# Altium PCB PowerBoard.PcbDoc (part 1 of 2)
Units mm, origin at the board's own origin, x right, y up, seen from the top; angles counter-clockwise.
Board outline 110 x 150 mm, 4 copper layers (Top Layer, Signal Layer 1, Signal Layer 2, Bottom Layer), stack 2.22 mm thick; 73 components, 20 nets, 361 pads, 2847 vias.
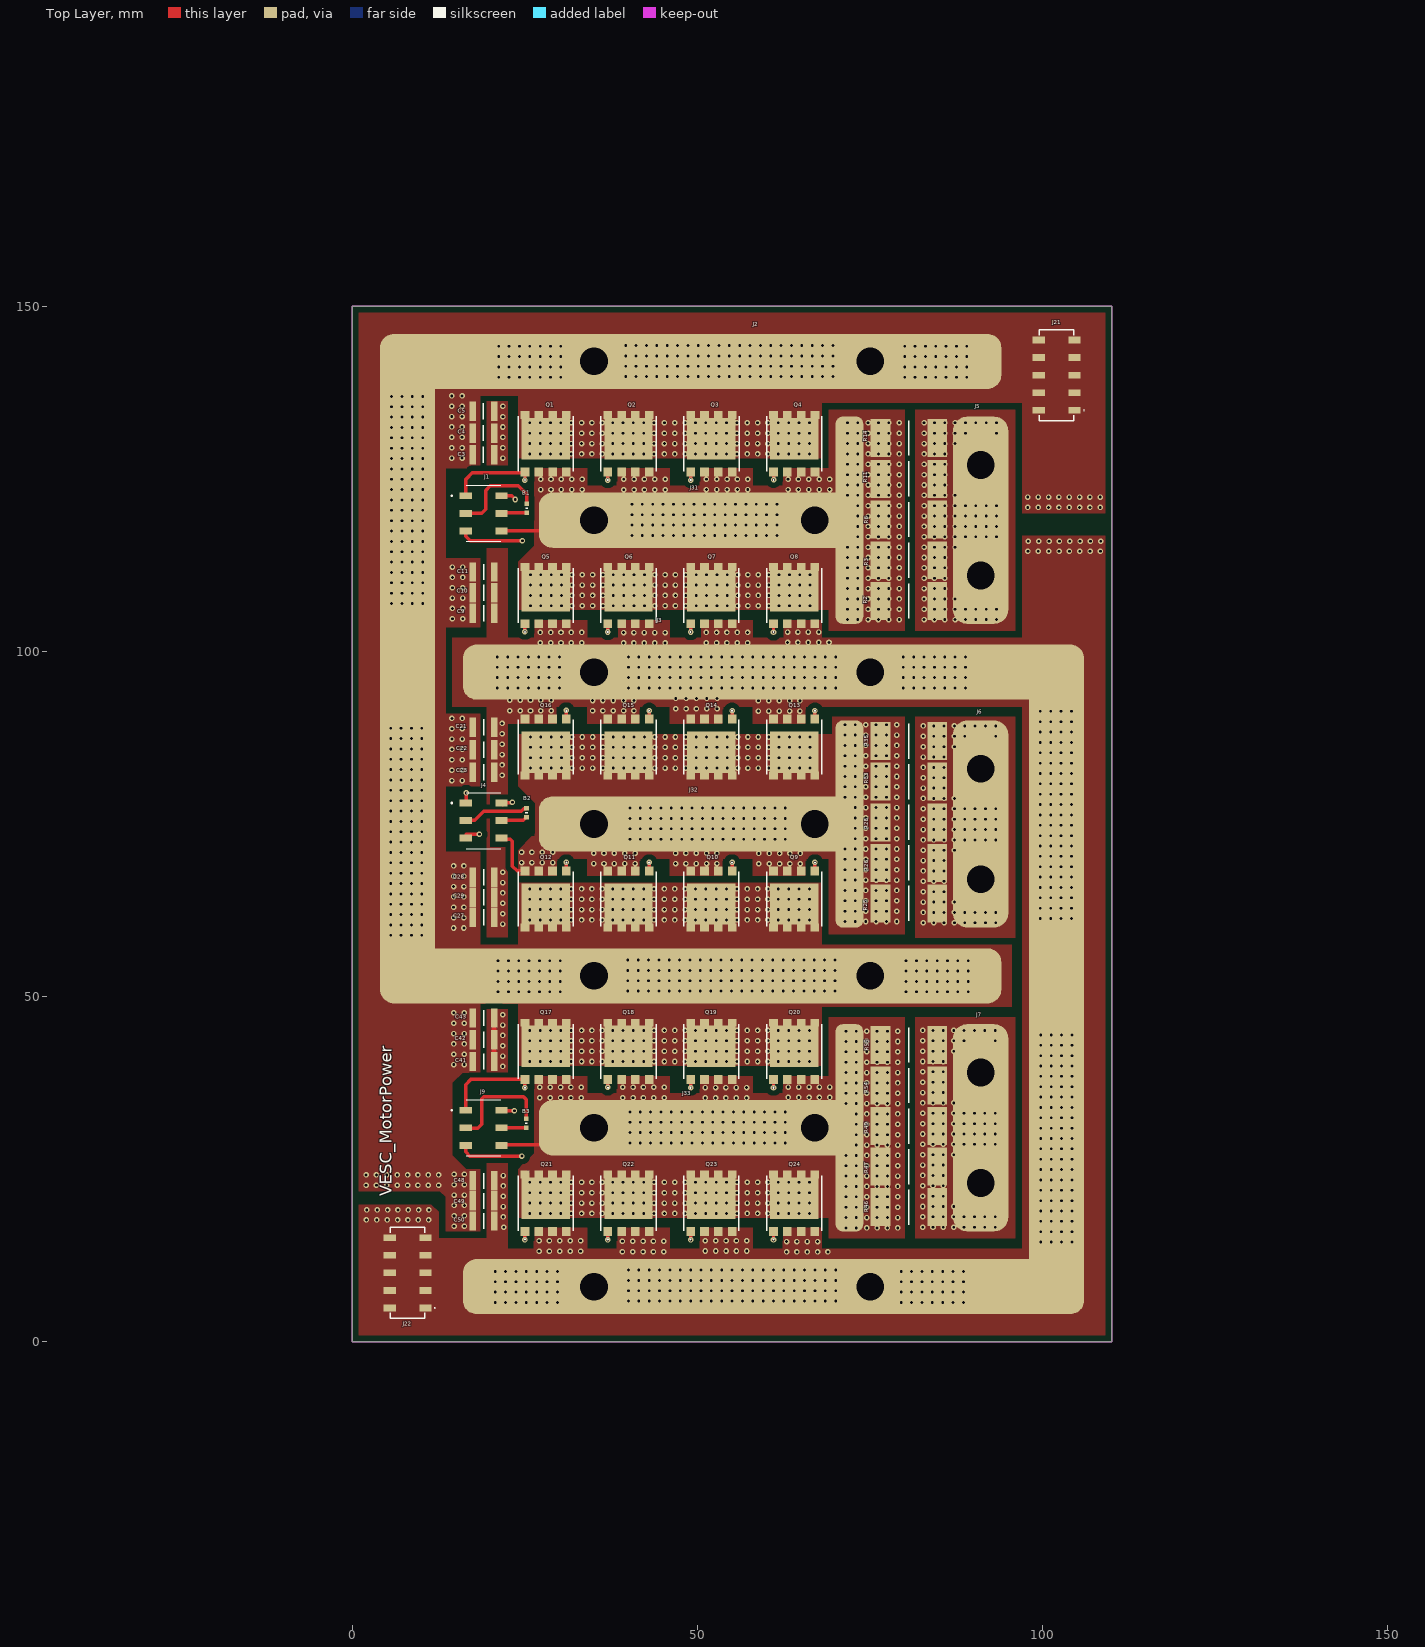
[diagram p0: Top Layer view]
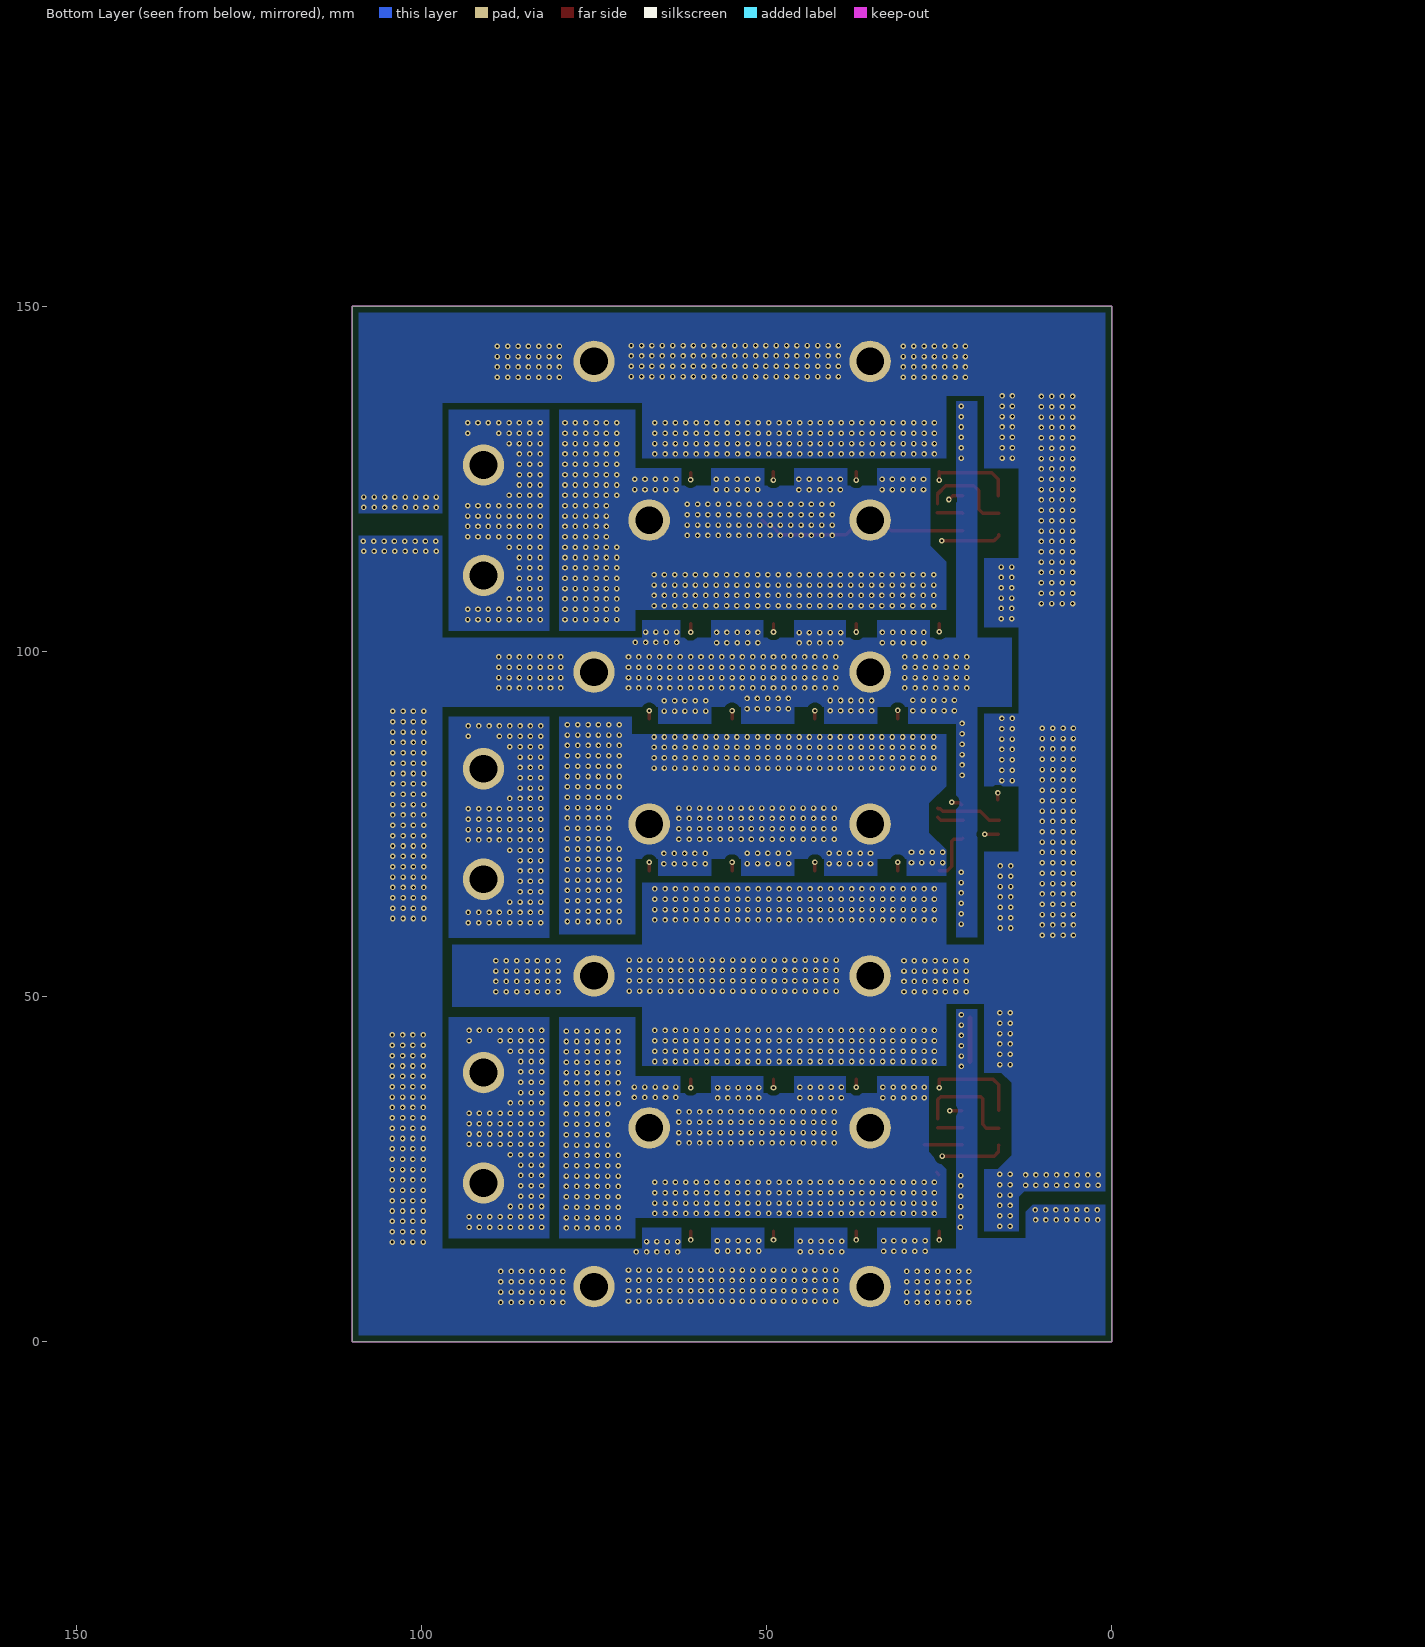
[diagram p1: Bottom Layer view, seen from below]
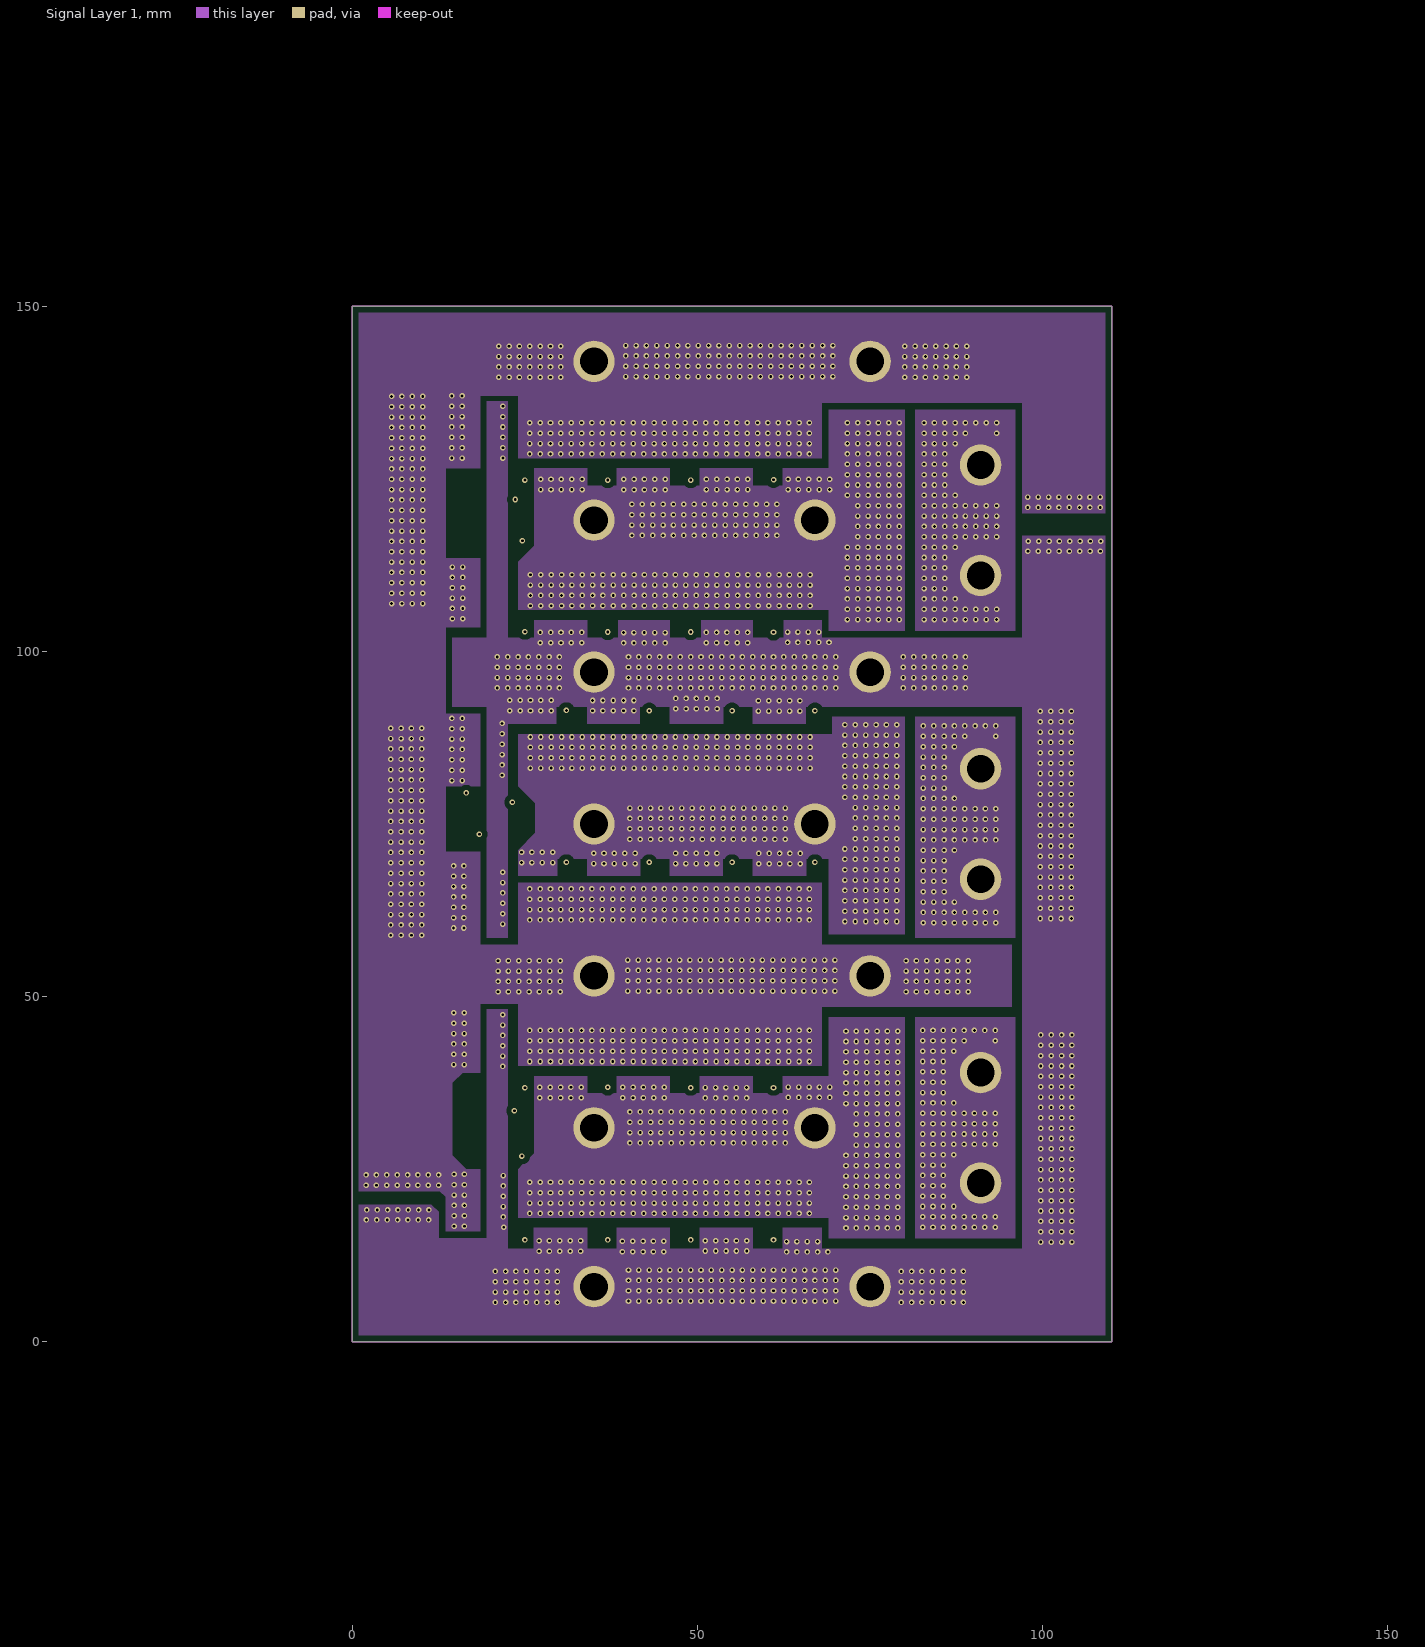
[diagram p2: Signal Layer 1]
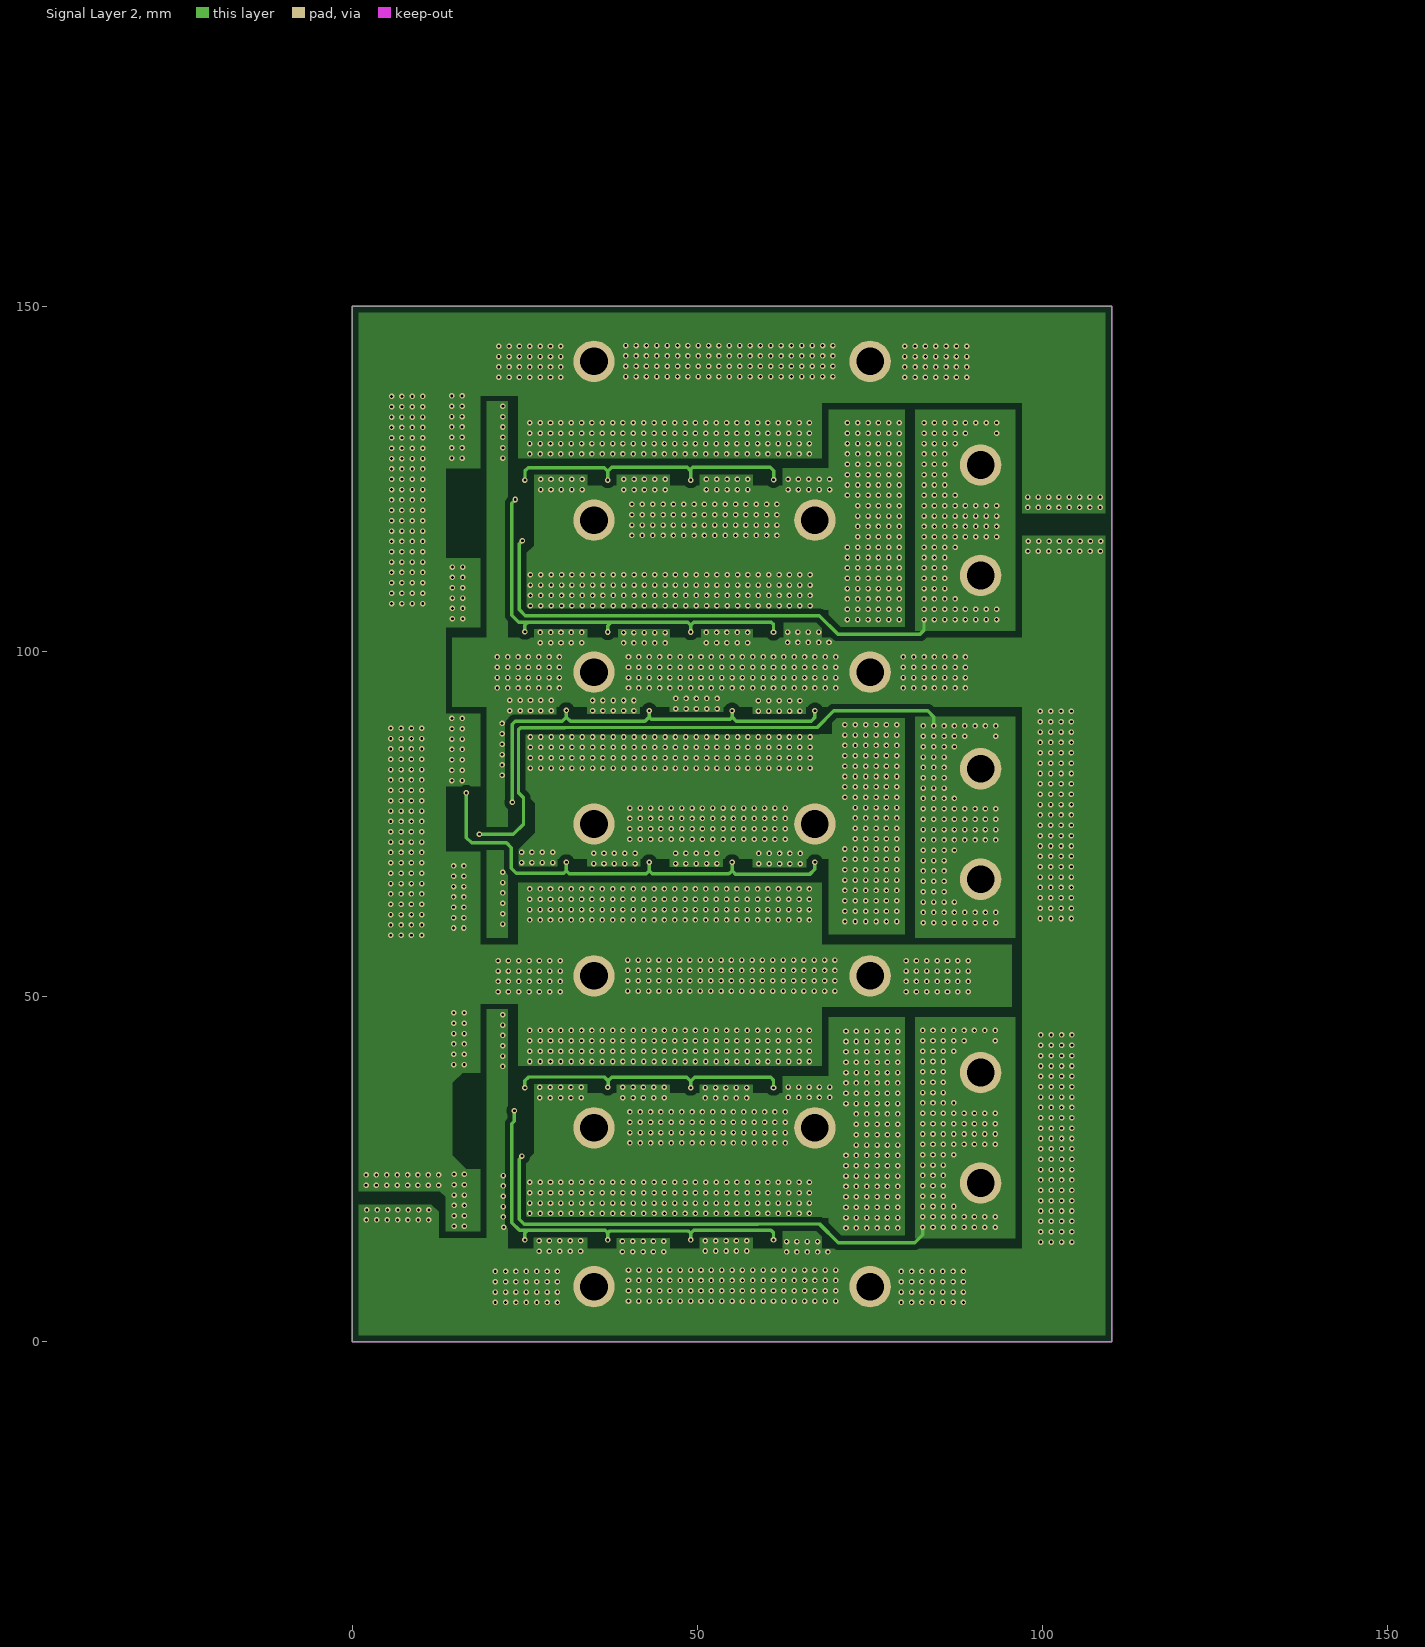
[diagram p3: Signal Layer 2]
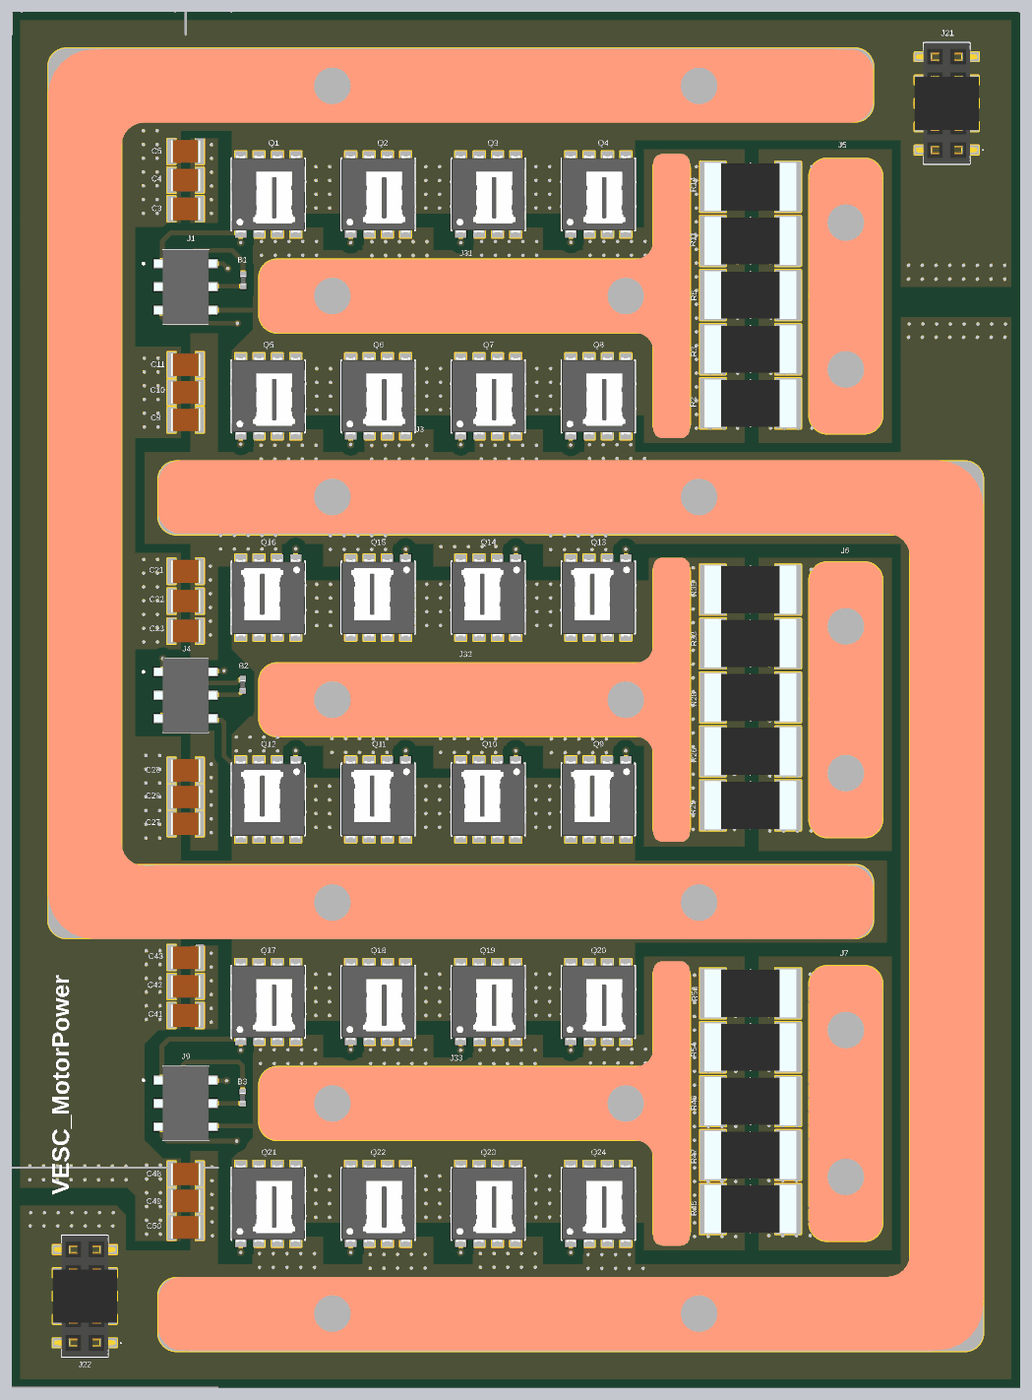
[diagram p5: 3D render of the assembled board from above, using the file's embedded part models]

## Layer stack, top to bottom
Top Solder: solder mask 0.025, Solder Resist, Dk 3.5
Top Layer: signal copper 0.07
Dielectric 2: core 0.254, Dk 4.2
Signal Layer 1: signal copper 0.036
Dielectric 4: core 1.5, Dk 4.2
Signal Layer 2: signal copper 0.036
Dielectric 3: core 0.254, Dk 4.2
Bottom Layer: signal copper 0.07
Bottom Solder: solder mask 0.025, Solder Resist, Dk 3.5

## Board outline
0,0 0,150 110,150 110,0

## Design rules (kind name [scope] priority, off if disabled: settings)
AssemblyTestPointUsage AssemblyTestPointUsage_1 [All] p2:
AssemblyTestpoint AssemblyTestpoint_1 [All] p1: testpointundercomponent=TRUE minsize=1.016 maxsize=2.54 preferedsize=1.524 minholesize=0 maxholesize=1.016 preferedholesize=0.813 testpointgrid=0.025 usegrid=TRUE gridtolerance=0 allowsidetop=TRUE allowsidebottom=TRUE
Clearance Clearance_1 [All] p1: gap=0.8 ignorepadtopadclearanceinfootprint=FALSE except(0.4: Arc-Arc Arc-Track Arc-SMDPad Arc-THPad Arc-Via Track-Track Track-SMDPad Track-THPad Track-Via SMDPad-SMDPad SMDPad-THPad SMDPad-Via THPad-THPad THPad-Via Via-Via)
ComponentClearance ComponentClearance_1 [All] p1: gap=0.2 collisioncheckmode=3 verticalgap=0.2 showdistances=TRUE
DiffPairsRouting DiffPairsRouting_1 [All] p1: maxlimit=0.254 minlimit=0.254 mostfreqgap=0.254 substack1={0391787D-B3DB-4B16-B312-97C439599AB4} toplayer_{0391787d-b3db-4b16-b312-97c439599ab4}_minwidth=0.381 toplayer_{0391787d-b3db-4b16-b312-97c439599ab4}_maxwidth=0.381 toplayer_{0391787d-b3db-4b16-b312-97c439599ab4}_prefwidth=0.381 midlayer1_{0391787d-b3db-4b16-b312-97c439599ab4}_minwidth=0.381 midlayer1_{0391787d-b3db-4b16-b312-97c439599ab4}_maxwidth=0.381 midlayer1_{0391787d-b3db-4b16-b312-97c439599ab4}_prefwidth=0.381 midlayer2_{0391787d-b3db-4b16-b312-97c439599ab4}_minwidth=0.381 midlayer2_{0391787d-b3db-4b16-b312-97c439599ab4}_maxwidth=0.381 midlayer2_{0391787d-b3db-4b16-b312-97c439599ab4}_prefwidth=0.381 bottomlayer_{0391787d-b3db-4b16-b312-97c439599ab4}_minwidth=0.381 bottomlayer_{0391787d-b3db-4b16-b312-97c439599ab4}_maxwidth=0.381 bottomlayer_{0391787d-b3db-4b16-b312-97c439599ab4}_prefwidth=0.381 substack2={0E55BCC6-0461-4BB8-A6DB-68FAAC3CF03A} toplayer_{0e55bcc6-0461-4bb8-a6db-68faac3cf03a}_minwidth=0.381 toplayer_{0e55bcc6-0461-4bb8-a6db-68faac3cf03a}_maxwidth=0.381 toplayer_{0e55bcc6-0461-4bb8-a6db-68faac3cf03a}_prefwidth=0.381 midlayer1_{0e55bcc6-0461-4bb8-a6db-68faac3cf03a}_minwidth=0.381 midlayer1_{0e55bcc6-0461-4bb8-a6db-68faac3cf03a}_maxwidth=0.381 midlayer1_{0e55bcc6-0461-4bb8-a6db-68faac3cf03a}_prefwidth=0.381 midlayer2_{0e55bcc6-0461-4bb8-a6db-68faac3cf03a}_minwidth=0.381 midlayer2_{0e55bcc6-0461-4bb8-a6db-68faac3cf03a}_maxwidth=0.381 midlayer2_{0e55bcc6-0461-4bb8-a6db-68faac3cf03a}_prefwidth=0.381 bottomlayer_{0e55bcc6-0461-4bb8-a6db-68faac3cf03a}_minwidth=0.381 bottomlayer_{0e55bcc6-0461-4bb8-a6db-68faac3cf03a}_maxwidth=0.381 bottomlayer_{0e55bcc6-0461-4bb8-a6db-68faac3cf03a}_prefwidth=0.381 substack3={7F91D735-8F98-4998-8FBE-C2B075826548} toplayer_{7f91d735-8f98-4998-8fbe-c2b075826548}_minwidth=0.381 toplayer_{7f91d735-8f98-4998-8fbe-c2b075826548}_maxwidth=0.381 toplayer_{7f91d735-8f98-4998-8fbe-c2b075826548}_prefwidth=0.381 midlayer1_{7f91d735-8f98-4998-8fbe-c2b075826548}_minwidth=0.381 midlayer1_{7f91d735-8f98-4998-8fbe-c2b075826548}_maxwidth=0.381 midlayer1_{7f91d735-8f98-4998-8fbe-c2b075826548}_prefwidth=0.381 midlayer2_{7f91d735-8f98-4998-8fbe-c2b075826548}_minwidth=0.381 midlayer2_{7f91d735-8f98-4998-8fbe-c2b075826548}_maxwidth=0.381 midlayer2_{7f91d735-8f98-4998-8fbe-c2b075826548}_prefwidth=0.381 bottomlayer_{7f91d735-8f98-4998-8fbe-c2b075826548}_minwidth=0.381 bottomlayer_{7f91d735-8f98-4998-8fbe-c2b075826548}_maxwidth=0.381 bottomlayer_{7f91d735-8f98-4998-8fbe-c2b075826548}_prefwidth=0.381 substack4={4ED4D01E-40BF-4D50-BA5A-F23A5EC9E761} toplayer_{4ed4d01e-40bf-4d50-ba5a-f23a5ec9e761}_minwidth=0.381 toplayer_{4ed4d01e-40bf-4d50-ba5a-f23a5ec9e761}_maxwidth=0.381 toplayer_{4ed4d01e-40bf-4d50-ba5a-f23a5ec9e761}_prefwidth=0.381 midlayer1_{4ed4d01e-40bf-4d50-ba5a-f23a5ec9e761}_minwidth=0.381 midlayer1_{4ed4d01e-40bf-4d50-ba5a-f23a5ec9e761}_maxwidth=0.381 midlayer1_{4ed4d01e-40bf-4d50-ba5a-f23a5ec9e761}_prefwidth=0.381 midlayer2_{4ed4d01e-40bf-4d50-ba5a-f23a5ec9e761}_minwidth=0.381 midlayer2_{4ed4d01e-40bf-4d50-ba5a-f23a5ec9e761}_maxwidth=0.381 midlayer2_{4ed4d01e-40bf-4d50-ba5a-f23a5ec9e761}_prefwidth=0.381 bottomlayer_{4ed4d01e-40bf-4d50-ba5a-f23a5ec9e761}_minwidth=0.381 bottomlayer_{4ed4d01e-40bf-4d50-ba5a-f23a5ec9e761}_maxwidth=0.381 bottomlayer_{4ed4d01e-40bf-4d50-ba5a-f23a5ec9e761}_prefwidth=0.381 substack5={57BA5FAC-A096-47A8-A9C3-28502E285703} toplayer_{57ba5fac-a096-47a8-a9c3-28502e285703}_minwidth=0.381 toplayer_{57ba5fac-a096-47a8-a9c3-28502e285703}_maxwidth=0.381 toplayer_{57ba5fac-a096-47a8-a9c3-28502e285703}_prefwidth=0.381 midlayer1_{57ba5fac-a096-47a8-a9c3-28502e285703}_minwidth=0.381 midlayer1_{57ba5fac-a096-47a8-a9c3-28502e285703}_maxwidth=0.381 midlayer1_{57ba5fac-a096-47a8-a9c3-28502e285703}_prefwidth=0.381 midlayer2_{57ba5fac-a096-47a8-a9c3-28502e285703}_minwidth=0.381 midlayer2_{57ba5fac-a096-47a8-a9c3-28502e285703}_maxwidth=0.381 midlayer2_{57ba5fac-a096-47a8-a9c3-28502e285703}_prefwidth=0.381 bottomlayer_{57ba5fac-a096-47a8-a9c3-28502e285703}_minwidth=0.381 bottomlayer_{57ba5fac-a096-47a8-a9c3-28502e285703}_maxwidth=0.381 bottomlayer_{57ba5fac-a096-47a8-a9c3-28502e285703}_prefwidth=0.381 toplayer_minwidth=0.381 toplayer_maxwidth=0.381 toplayer_prefwidth=0.381 midlayer1_minwidth=0.381 midlayer1_maxwidth=0.381 midlayer1_prefwidth=0.381 midlayer2_minwidth=0.381 midlayer2_maxwidth=0.381 midlayer2_prefwidth=0.381 bottomlayer_minwidth=0.381 bottomlayer_maxwidth=0.381 bottomlayer_prefwidth=0.381 substack6={B351C19E-D50C-4F2F-B5BB-791B69F230FF} toplayer_{b351c19e-d50c-4f2f-b5bb-791b69f230ff}_minwidth=0.381 toplayer_{b351c19e-d50c-4f2f-b5bb-791b69f230ff}_maxwidth=0.381 toplayer_{b351c19e-d50c-4f2f-b5bb-791b69f230ff}_prefwidth=0.381 midlayer1_{b351c19e-d50c-4f2f-b5bb-791b69f230ff}_minwidth=0.381 midlayer1_{b351c19e-d50c-4f2f-b5bb-791b69f230ff}_maxwidth=0.381 midlayer1_{b351c19e-d50c-4f2f-b5bb-791b69f230ff}_prefwidth=0.381 midlayer2_{b351c19e-d50c-4f2f-b5bb-791b69f230ff}_minwidth=0.381 midlayer2_{b351c19e-d50c-4f2f-b5bb-791b69f230ff}_maxwidth=0.381 midlayer2_{b351c19e-d50c-4f2f-b5bb-791b69f230ff}_prefwidth=0.381 bottomlayer_{b351c19e-d50c-4f2f-b5bb-791b69f230ff}_minwidth=0.381 bottomlayer_{b351c19e-d50c-4f2f-b5bb-791b69f230ff}_maxwidth=0.381 bottomlayer_{b351c19e-d50c-4f2f-b5bb-791b69f230ff}_prefwidth=0.381 substack7={2F1B6B62-C7FD-47FC-965D-ED7560D8E9E8} toplayer_{2f1b6b62-c7fd-47fc-965d-ed7560d8e9e8}_minwidth=0.381 toplayer_{2f1b6b62-c7fd-47fc-965d-ed7560d8e9e8}_maxwidth=0.381 toplayer_{2f1b6b62-c7fd-47fc-965d-ed7560d8e9e8}_prefwidth=0.381 midlayer1_{2f1b6b62-c7fd-47fc-965d-ed7560d8e9e8}_minwidth=0.381 midlayer1_{2f1b6b62-c7fd-47fc-965d-ed7560d8e9e8}_maxwidth=0.381 midlayer1_{2f1b6b62-c7fd-47fc-965d-ed7560d8e9e8}_prefwidth=0.381 midlayer2_{2f1b6b62-c7fd-47fc-965d-ed7560d8e9e8}_minwidth=0.381 midlayer2_{2f1b6b62-c7fd-47fc-965d-ed7560d8e9e8}_maxwidth=0.381 midlayer2_{2f1b6b62-c7fd-47fc-965d-ed7560d8e9e8}_prefwidth=0.381 bottomlayer_{2f1b6b62-c7fd-47fc-965d-ed7560d8e9e8}_minwidth=0.381 bottomlayer_{2f1b6b62-c7fd-47fc-965d-ed7560d8e9e8}_maxwidth=0.381 bottomlayer_{2f1b6b62-c7fd-47fc-965d-ed7560d8e9e8}_prefwidth=0.381 substack8={A0CE5E7A-17C9-422A-884C-87F0A86ADDD9} toplayer_{a0ce5e7a-17c9-422a-884c-87f0a86addd9}_minwidth=0.381 toplayer_{a0ce5e7a-17c9-422a-884c-87f0a86addd9}_maxwidth=0.381 toplayer_{a0ce5e7a-17c9-422a-884c-87f0a86addd9}_prefwidth=0.381 midlayer1_{a0ce5e7a-17c9-422a-884c-87f0a86addd9}_minwidth=0.381 midlayer1_{a0ce5e7a-17c9-422a-884c-87f0a86addd9}_maxwidth=0.381 midlayer1_{a0ce5e7a-17c9-422a-884c-87f0a86addd9}_prefwidth=0.381 midlayer2_{a0ce5e7a-17c9-422a-884c-87f0a86addd9}_minwidth=0.381 midlayer2_{a0ce5e7a-17c9-422a-884c-87f0a86addd9}_maxwidth=0.381 midlayer2_{a0ce5e7a-17c9-422a-884c-87f0a86addd9}_prefwidth=0.381 bottomlayer_{a0ce5e7a-17c9-422a-884c-87f0a86addd9}_minwidth=0.381 bottomlayer_{a0ce5e7a-17c9-422a-884c-87f0a86addd9}_maxwidth=0.381 bottomlayer_{a0ce5e7a-17c9-422a-884c-87f0a86addd9}_prefwidth=0.381 maxuncoupledlength=12.7
FabricationTestPointUsage FabricationTestPointUsage_1 [All] p1: valid=0 allowmultiple=FALSE
FabricationTestpoint FabricationTestpoint_1 [All] p1: side=3 testpointundercomponent=TRUE minsize=1.016 maxsize=2.54 preferedsize=1.524 minholesize=0 maxholesize=1.016 preferedholesize=0.813 testpointgrid=0.025 allowsidetop=TRUE allowsidebottom=TRUE usegrid=TRUE gridtolerance=0
FanoutControl Fanout_BGA_1 [IsBGA] p1: bgadir=Out bgaviamode=Centered fanoutstyle=Auto fanoutdirection=Alternating viagrid=0.025 // Fanout_BGA (Default Rule)
FanoutControl Fanout_LCC_1 [IsLCC] p2: bgadir=Out bgaviamode=Centered fanoutstyle=Auto fanoutdirection=Alternating viagrid=0.025 // Fanout_LCC (Default Rule)
FanoutControl Fanout_SOIC_1 [IsSOIC] p3: bgadir=Out bgaviamode=Centered fanoutstyle=Auto fanoutdirection=Alternating viagrid=0.025 // Fanout_SOIC (Default Rule)
FanoutControl Fanout_Small_1 [(CompPinCount < 5)] p4: bgadir=Out bgaviamode=Centered fanoutstyle=Auto fanoutdirection=OutThenIn viagrid=0.025 // Fanout_Small (Default Rule)
FanoutControl Fanout_Default_1 [All] p5: bgadir=Out bgaviamode=Centered fanoutstyle=Auto fanoutdirection=Alternating viagrid=0.025 // Fanout_Default (Default Rule)
Height Height_1 [All] p1: minheight=0 maxheight=25.4 prefheight=12.7
HoleSize HoleSize_1 [All] p1: absolutevalues=TRUE maxlimit=5 minlimit=0.3 maxpercent=80.000 minpercent=20.000
HoleToHoleClearance HoleToHoleClearance_1 [All] p1: gap=0.254 allowstackedmicrovias=TRUE
LayerPairs LayerPairs_1 [All] p1: enforce=TRUE
MinimumSolderMaskSliver MinimumSolderMaskSliver_1 [All] p1: minsoldermaskwidth=0.1
NetAntennae NetAntennae_1 [InNetClass('VIN')] p1: netantennaetolerance=0
PasteMaskExpansion PasteMaskExpansion_1 [All] p1: expansion=0
PlaneClearance PlaneClearance_1 [All] p1: clearance=0.508
PlaneConnect PlaneConnect_1 [All] p1: planeconnectstyle=Relief reliefexpansion=0.508 reliefentries=4 reliefconductorwidth=0.254 reliefairgap=0.254
PolygonConnect PolygonConnect_1 [All] p1: connectstyle=Direct reliefconductorwidth=0.254 reliefentries=4 polygonreliefangle="90 Angle" airgapwidth=0.254
RoomDefinition PowerBoard [InComponentClass('PowerBoard')] p1: confinementstyle=ConfineOut formatcopy=TRUE lockcomponents=FALSE outline -494.612,-773.935 -443.812,-773.935 -443.812,-748.535 -494.612,-748.535
RoutingCorners RoutingCorners_1 [All] p1: cornerstyle=45-Degree minsetback=2.54 maxsetback=2.54
RoutingLayers RoutingLayers_1 [All] p1: top layer_v5=TRUE mid layer 1_v5=TRUE mid layer 2_v5=TRUE bottom layer_v5=TRUE
RoutingPriority RoutingPriority_1 [All] p1: routingpriority=0
RoutingTopology RoutingTopology_1 [All] p1: topology=Shortest
RoutingVias RoutingVias_1 [All] p1: holewidth=0.4 width=0.8 viastyle="Through Hole" minholewidth=0.3 minwidth=0.6 maxholewidth=5 maxwidth=10
ShortCircuit ShortCircuit_1 [All] p1: allowed=FALSE
SilkToBoardRegionClearance SilkToBoardRegionClearance_1 [All] p2:
SilkToSilkClearance SilkToSilkClearance_1 [All] p1: silktosilkclearance=0
SilkToSolderMaskClearance SilkToSolderMaskClearance_1 [IsPad] p1: minsilkscreentomaskgap=0 clearancetoexposedcopper=TRUE
SolderMaskExpansion SolderMaskExpansion_1 [All] p1: expansion=0.102 istentingtop=FALSE
UnRoutedNet UnRoutedNet_1 [All] p1:
UnpouredPolygon UnpouredPolygon_1 [All] p1:
Width Width_1 [All] p1: maxlimit=3.048 minlimit=0.2 preferedwidth=0.254 substack1={0391787D-B3DB-4B16-B312-97C439599AB4} substack2={0E55BCC6-0461-4BB8-A6DB-68FAAC3CF03A} substack3={7F91D735-8F98-4998-8FBE-C2B075826548} substack4={4ED4D01E-40BF-4D50-BA5A-F23A5EC9E761} substack5={57BA5FAC-A096-47A8-A9C3-28502E285703} substack6={B351C19E-D50C-4F2F-B5BB-791B69F230FF} substack7={2F1B6B62-C7FD-47FC-965D-ED7560D8E9E8} substack8={A0CE5E7A-17C9-422A-884C-87F0A86ADDD9}
2 further rules are at their usual default settings.

## Components (designator, comment, footprint, x,y, rotation, side; value= is the part's Value field where it differs from the comment)
B1 "NTCS0402E3103GL1T" THRMC1005X65N 25.273,120.726 r270 top
B2 "NTCS0402E3103GL1T" THRMC1005X65N 25.222,76.632 r270 top
B3 "NTCS0402E3103GL1T" THRMC1005X65N 25.2,31.65 r270 top
C3 "10uF/100V" CAPC3225X230N 18.992,128.5 r180 top
C4 "10uF/100V" CAPC3225X230N 18.992,131.628 r180 top
C5 "10uF/100V" CAPC3225X230N 18.992,134.756 r180 top
C9 "10uF/100V" CAPC3225X230N 19,105.5 r0 top
C10 "10uF/100V" CAPC3225X230N 19,108.5 r0 top
C11 "10uF/100V" CAPC3225X230N 19,111.5 r0 top
C21 "10uF/100V" CAPC3225X230N 19,89 r180 top
C22 "10uF/100V" CAPC3225X230N 19,85.75 r180 top
C23 "10uF/100V" CAPC3225X230N 19,82.5 r180 top
C27 "10uF/100V" CAPC3225X230N 19,61.5 r0 top
C28 "10uF/100V" CAPC3225X230N 19,67.3 r0 top
C29 "10uF/100V" CAPC3225X230N 19,64.4 r0 top
C41 "10uF/100V" CAPC3225X230N 19,40.6 r180 top
C42 "10uF/100V" CAPC3225X230N 19,43.75 r180 top
C43 "10uF/100V" CAPC3225X230N 19,46.9 r180 top
C48 "10uF/100V" CAPC3225X230N 19,23.3 r0 top
C49 "10uF/100V" CAPC3225X230N 19,20.4 r0 top
C50 "10uF/100V" CAPC3225X230N 19,17.5 r0 top
J1 "PHASE_U" 61030621821 19,120 r270 top locked value=61030621821
J2 "74651194R" COPPER_CON1 35,142 r0 top locked
J3 "74651194R" COPPER_CON1 75,8 r180 top locked
J4 "PHASE_V" 61030621821 19,75.5 r270 top locked value=61030621821
J5 "74651194R" COPPER_CON3 91,119 r180 top locked
J6 "74651194R" COPPER_CON3 91,75 r0 top locked
J7 "74651194R" COPPER_CON3 91,31 r180 top locked
J9 "PHASE_W" 61030621821 19,31 r270 top locked value=61030621821
J21 "VIN+" 61031021821 102,140 r90 top locked value=61031021821
J22 "VIN-" 61031021821 8,10 r90 top locked value=61031021821
J31 "" COPPER_BUS 35,119 r0 top locked value=74651194R
J32 "" COPPER_BUS 35,75 r0 top locked value=74651194R
J33 "" COPPER_BUS 35,31 r0 top locked value=74651194R
Q1 "NTMSC002N10MCTXG" NTMSC002N10MCTXG 28.005,130.92 r90 top locked
Q2 "NTMSC002N10MCTXG" NTMSC002N10MCTXG 40,130.92 r90 top locked
Q3 "NTMSC002N10MCTXG" NTMSC002N10MCTXG 52.007,130.92 r90 top locked
Q4 "NTMSC002N10MCTXG" NTMSC002N10MCTXG 64.007,130.92 r90 top locked
Q5 "NTMSC002N10MCTXG" NTMSC002N10MCTXG 28,108.915 r90 top locked
Q6 "NTMSC002N10MCTXG" NTMSC002N10MCTXG 40,108.915 r90 top locked
Q7 "NTMSC002N10MCTXG" NTMSC002N10MCTXG 52,108.915 r90 top locked
Q8 "NTMSC002N10MCTXG" NTMSC002N10MCTXG 64,108.915 r90 top locked
Q9 "NTMSC002N10MCTXG" NTMSC002N10MCTXG 64,63.295 r270 top locked
Q10 "NTMSC002N10MCTXG" NTMSC002N10MCTXG 52,63.295 r270 top locked
Q11 "NTMSC002N10MCTXG" NTMSC002N10MCTXG 40,63.295 r270 top locked
Q12 "NTMSC002N10MCTXG" NTMSC002N10MCTXG 28,63.295 r270 top locked
Q13 "NTMSC002N10MCTXG" NTMSC002N10MCTXG 64,85.295 r270 top locked
Q14 "NTMSC002N10MCTXG" NTMSC002N10MCTXG 52,85.295 r270 top locked
Q15 "NTMSC002N10MCTXG" NTMSC002N10MCTXG 40,85.295 r270 top locked
Q16 "NTMSC002N10MCTXG" NTMSC002N10MCTXG 28,85.295 r270 top locked
Q17 "NTMSC002N10MCTXG" NTMSC002N10MCTXG 28,42.915 r90 top locked
Q18 "NTMSC002N10MCTXG" NTMSC002N10MCTXG 40,42.915 r90 top locked
Q19 "NTMSC002N10MCTXG" NTMSC002N10MCTXG 52,42.915 r90 top locked
Q20 "NTMSC002N10MCTXG" NTMSC002N10MCTXG 64,42.915 r90 top locked
Q21 "NTMSC002N10MCTXG" NTMSC002N10MCTXG 28,20.915 r90 top locked
Q22 "NTMSC002N10MCTXG" NTMSC002N10MCTXG 40,20.915 r90 top locked
Q23 "NTMSC002N10MCTXG" NTMSC002N10MCTXG 52,20.915 r90 top locked
Q24 "NTMSC002N10MCTXG" NTMSC002N10MCTXG 64,20.915 r90 top locked
R2 "0.5mR/9W" RESC10052X137N 80.6,107.3 r180 top locked value="0.5ohm 9W"
R3 "0.5mR/9W" RESC10052X137N 80.6,113.2 r180 top locked value="0.5ohm 9W"
R6 "0.5mR/9W" RESC10052X137N 80.6,119.1 r180 top locked value="0.5ohm 9W"
R11 "0.5mR/9W" RESC10052X137N 80.6,125 r180 top locked value="0.5ohm 9W"
R14 "0.5mR/9W" RESC10052X137N 80.6,130.9 r180 top locked value="0.5ohm 9W"
R25 "0.5mR/9W" RESC10052X137N 80.6,63.5 r180 top locked value="0.5ohm 9W"
R26 "0.5mR/9W" RESC10052X137N 80.6,69.375 r180 top locked value="0.5ohm 9W"
R28 "0.5mR/9W" RESC10052X137N 80.6,75.25 r180 top locked value="0.5ohm 9W"
R33 "0.5mR/9W" RESC10052X137N 80.6,81.125 r180 top locked value="0.5ohm 9W"
R35 "0.5mR/9W" RESC10052X137N 80.6,87 r180 top locked value="0.5ohm 9W"
R46 "0.5mR/9W" RESC10052X137N 80.6,19.5 r180 top locked value="0.5ohm 9W"
R47 "0.5mR/9W" RESC10052X137N 80.6,25.375 r180 top locked value="0.5ohm 9W"
R49 "0.5mR/9W" RESC10052X137N 80.6,31.25 r180 top locked value="0.5ohm 9W"
R54 "0.5mR/9W" RESC10052X137N 80.6,37.125 r180 top locked value="0.5ohm 9W"
R56 "0.5mR/9W" RESC10052X137N 80.6,43 r180 top locked value="0.5ohm 9W"

## Footprints (in the part's own frame and the unit in brackets; to place one, negate y for a bottom-side part, rotate by r counter-clockwise, add the part's x,y. Pads: shape width x height; smd on the part's side, far side on the other; paste and mask are expansions set on the pad)
61030621821 [mm]
  rect 1x1.8 smd: 1(-2.54,-2.6) 2(-2.54,2.6) 3(0,-2.6) 4(0,2.6) 5(2.54,-2.6) 6(2.54,2.6)
  silkscreen extent -4.06,-4.7 4.06,2.5, body extent -4.06,-3.4 4.06,3.4, height 7.85
61031021821 [mm]
  rect 1x1.8 smd: 1(-5.08,-2.6) 2(-5.08,2.6) 3(-2.54,-2.6) 4(-2.54,2.6) 5(0,-2.6) 6(0,2.6) 7(2.54,-2.6) 8(2.54,2.6) 9(5.08,-2.6) 10(5.08,2.6)
  silkscreen extent -6.6,-4 6.6,2.5, body extent -6.6,-3.5 6.6,3.5, height 8.4
CAPC3225X230N [mm]
  rect 0.92x2.82 smd: 1(-1.54,0) 2(1.54,0)
  silkscreen extent 0,-1.15 0,1.15, body extent -1.6,-1.25 1.6,1.25, height 2.47
COPPER_BUS [mm]
  round 6 hole 4: 1(0,0) 1(32,0)
  rrect50% 47x8 smd: 1(15.5,0)
  rrect50% 4x30 smd: 1(37,0)
  body extent -8,-15.5 39,15.5, height 5
COPPER_CON1 [mm]
  rrect50% 8x97 smd: 1(-27,-44.5)
  round 6 hole 4: 1(0,-89) 1(0,0) 1(40,-89) 1(40,0)
  rrect50% 90x8 smd: 1(14,-89) 1(14,0)
  body extent -31,-93.1 59,3.9, height 38.5
COPPER_CON3 [mm]
  round 6 hole 4: 1(0,8) 1(0,-8)
  rrect50% 8x30 smd: 1(0,0)
  body extent -4,-15 4,15, height 38.5
NTMSC002N10MCTXG [mm]
  rect 6x7 smd: DRAIN(-0.12,0)
  rect 1.15x1.25 smd: DRAIN(3.295,-3) DRAIN(3.295,-1) DRAIN(3.295,1) DRAIN(3.295,3)
  rect 1.28x1.25 smd: GATE(-4.915,3) SOURCE(-4.915,-3) SOURCE(-4.915,-1) SOURCE(-4.915,1)
  silkscreen extent -6.16,-4 3.11,4, body extent -5.03,-4.15 3.37,4.15, height 1.02
RESC10052X137N [mm] "RESISTOR SMD 0603"
  rect 2.85x5.5 smd: 1(-4.1,0) 2(4.1,0)
  silkscreen extent 0,-2.52 0,2.52, body extent -5,-2.63 5,2.63, height 1.37
THRMC1005X65N [mm]
  rect 0.65x0.7 smd: 1(-0.65,0) 2(0.65,0)
  silkscreen extent 0,-0.15 0,0.15, body extent -0.5,-0.25 0.5,0.25, height 0.65

## Part data
B1 B2 B3: "NTC Thermistors 10Kohms 2% AEC-Q200", Manufacturer=Vishay, Supplier Part Number=594-NTCS402E3103GL1T, Manufacturer Part Number=NTCS0402E3103GL1T, Price=0.47, Supplier=Mouser
C3 C4 C5 C9 C10 C11 C21 C22 C23 C27 C28 C29 C41 C42 C43 C48 C49 C50: library part "10uF ± 10% 100V", "Multilayer Ceramic Capacitors MLCC - SMD/SMT 1210 100VDC 10uF 10% X7R", Manufacturer=TDK, Manufacturer Part Number=C3225X7R2A106K250AC, Supplier Part Number=810-C3225X7R2A106K25, Price=1.42, Supplier=Mouser
J1 J4 J9: library part "Female Header 6 Pin_1", "Headers & Wire Housings WERI Header 2,54 mm SMT", Manufacturer="Wurth Elektronik", Manufacturer Part Number=61030621821, Supplier Part Number=710-61030621821, Price=1.8, Supplier=Mouser
J2 J3: library part CopperCon1, "WP-THRSH REDCUBE THR with external thread, M4 x 5mm, 85A", Manufacturer="Wurth Elektronik", Operating Temperature Max=150°C, Operating Temperature Min=-55°C, Rated Current=85A, Supplier Part Number=710-74651195R, Category="REDCUBE THR", ComponentLink1Description="Website Link", ComponentLink1URL=https://www.we-online.com/redexpert/article/74651194R?ad, ComponentLink2Description="Datasheet Link", ComponentLink2URL=https://www.we-online.com/redexpert/spec/74651194R?ad, Height=8.5mm, Length=10mm, Manufacturer Part Number=74651194R, Match Code=WP-THRSH, Material=Brass, Mount="Through Hole Reflow", Number of Pins=9, Packaging="Tape and Reel", Price=3.5, Supplier=Mouser, Surface=Tin, Thread Length=5mm, Thread Size=M4, Width=10mm
J5 J6 J7: library part CopperCon3, "WP-THRSH REDCUBE THR with external thread, M4 x 5mm, 85A", Manufacturer="Wurth Elektronik", Operating Temperature Max=150°C, Operating Temperature Min=-55°C, Rated Current=85A, Supplier Part Number=710-74651195R, Category="REDCUBE THR", ComponentLink1Description="Website Link", ComponentLink1URL=https://www.we-online.com/redexpert/article/74651194R?ad, ComponentLink2Description="Datasheet Link", ComponentLink2URL=https://www.we-online.com/redexpert/spec/74651194R?ad, Height=8.5mm, Length=10mm, Manufacturer Part Number=74651194R, Match Code=WP-THRSH, Material=Brass, Mount="Through Hole Reflow", Number of Pins=9, Packaging="Tape and Reel", Price=3.5, Supplier=Mouser, Surface=Tin, Thread Length=5mm, Thread Size=M4, Width=10mm
J21 J22: library part "Female Header 10 Pin_1", "Headers & Wire Housings WR-PHD 250VAC 3A Gry 2Row 10Pos Strgt", Manufacturer="Wurth Elektronik", Manufacturer Part Number=61031021821, Supplier Part Number=710-61031021821, Price=2, Supplier=Mouser
J31 J32 J33: library part CopperBus, "WP-THRSH REDCUBE THR with external thread, M4 x 5mm, 85A", Manufacturer="Wurth Elektronik", Manufacturer Part Number=74651194R, Operating Temperature Max=150°C, Operating Temperature Min=-55°C, Rated Current=85A, Supplier Part Number=710-74651195R, Category="REDCUBE THR", ComponentLink1Description="Website Link", ComponentLink1URL=https://www.we-online.com/redexpert/article/74651194R?ad, ComponentLink2Description="Datasheet Link", ComponentLink2URL=https://www.we-online.com/redexpert/spec/74651194R?ad, Height=8.5mm, Length=10mm, Match Code=WP-THRSH, Material=Brass, Mount="Through Hole Reflow", Number of Pins=9, Packaging="Tape and Reel", Price=3.5, Supplier=Mouser, Surface=Tin, Thread Length=5mm, Thread Size=M4, Width=10mm
Q1 Q2 Q3 Q4 Q5 Q6 Q7 Q8 Q9 Q10 Q11 Q12 Q13 Q14 Q15 Q16 Q17 Q18 Q19 Q20 Q21 Q22 Q23 Q24: "MOSFET Single N-Channel Power MOSFET 100V, 236A, 2.0mohm", Manufacturer=Onsemi, Manufacturer Part Number=NTMTSC002N10MCTXG, Supplier Part Number=863-TMTSC002N10MCTXG, Price=5.9, Supplier=Mouser
R2 R3 R6 R11 R14 R25 R26 R28 R33 R35 R46 R47 R49 R54 R56: library part CSS2H-3920R-L500FE, "Current Sense Resistors - SMD 0.5mOHMS 9W 1% AEC-Q200", Manufacturer=Bourns, Supplier Part Number=652-CSS2H3920RL500FE, Manufacturer Part Number=CSS2H-3920R-L500FE, Price=2, Supplier=Mouser

## Via types
v1: diameter 0.8, hole 0.4, Top Layer to Bottom Layer, tented both sides, 2847 vias

## Nets (pads, with @x,y where several pads share a name; then routed paths per layer and width w, separated by ;. In a path a pad name is that pad's centre, name@x,y a point inside that pad or via, vN(x,y) a via of type N, cw(c..) or ccw(c..) an arc to the next point about the centre after c; other vN are vias at no path point)
GND: C3.1 C4.1 C5.1 C9.2 C10.2 C11.2 C21.1 C22.1 C23.1 C27.2 C28.2 C29.2 C41.1 C42.1 C43.1 C48.2 C49.2 C50.2 J3.1 J22.1 J22.2 J22.3 J22.4 J22.5 J22.6 J22.7 J22.8 J22.9 J22.10 Q5.SOURCE Q6.SOURCE Q7.SOURCE Q8.SOURCE Q13.SOURCE Q14.SOURCE Q15.SOURCE Q16.SOURCE Q21.SOURCE Q22.SOURCE Q23.SOURCE Q24.SOURCE | length 6.3
  Top Layer w0.75: C41.1@20.54,40.6 C42.1@20.54,43.75 C43.1@20.54,46.9
  other v1: 20.7,5.7 22.2,5.7 23.7,5.7 25.2,5.7 26.7,5.7 28.2,5.7 29.7,5.7 79.5,5.7 81,5.7 82.5,5.7 84,5.7 85.5,5.7 87,5.7 88.5,5.7 40,5.9 41.5,5.9 43,5.9 44.5,5.9 46,5.9 47.5,5.9 49,5.9 50.5,5.9 52,5.9 53.5,5.9 55,5.9 56.5,5.9 58,5.9 59.5,5.9 61,5.9 62.5,5.9 64,5.9 65.5,5.9 67,5.9 68.5,5.9 70,5.9 20.7,7.2 22.2,7.2 23.7,7.2 25.2,7.2 26.7,7.2 28.2,7.2 29.7,7.2 79.5,7.2 81,7.2 82.5,7.2 84,7.2 85.5,7.2 87,7.2 88.5,7.2 40,7.4 41.5,7.4 43,7.4 44.5,7.4 46,7.4 47.5,7.4 49,7.4 50.5,7.4 52,7.4 53.5,7.4 55,7.4 56.5,7.4 58,7.4 59.5,7.4 61,7.4 62.5,7.4 64,7.4 65.5,7.4 67,7.4 68.5,7.4 70,7.4 20.7,8.7 22.2,8.7 23.7,8.7 25.2,8.7 26.7,8.7 28.2,8.7 29.7,8.7 79.5,8.7 81,8.7 82.5,8.7 84,8.7 85.5,8.7 87,8.7 88.5,8.7 40,8.9 41.5,8.9 43,8.9 44.5,8.9 46,8.9 47.5,8.9 49,8.9 50.5,8.9 52,8.9 53.5,8.9 55,8.9 56.5,8.9 58,8.9 59.5,8.9 61,8.9 62.5,8.9 64,8.9 65.5,8.9 67,8.9 68.5,8.9 70,8.9 20.7,10.2 22.2,10.2 23.7,10.2 25.2,10.2 26.7,10.2 28.2,10.2 29.7,10.2 79.5,10.2 81,10.2 82.5,10.2 84,10.2 85.5,10.2 87,10.2 88.5,10.2 40,10.4 41.5,10.4 43,10.4 44.5,10.4 46,10.4 47.5,10.4 49,10.4 50.5,10.4 52,10.4 53.5,10.4 55,10.4 56.5,10.4 58,10.4 59.5,10.4 61,10.4 62.5,10.4 64,10.4 65.5,10.4 67,10.4 68.5,10.4 70,10.4 62.89,13.029 64.39,13.029 65.89,13.029 67.39,13.029 68.89,13.029 39.116,13.054 40.616,13.054 42.116,13.054 43.616,13.054 45.116,13.054 27.051,13.13 28.551,13.13 30.051,13.13 31.551,13.13 33.051,13.13 51.13,13.156 52.63,13.156 54.13,13.156 55.63,13.156 57.13,13.156 99.72,14.45 101.22,14.45 102.72,14.45 104.22,14.45 62.89,14.529 64.39,14.529 65.89,14.529 67.39,14.529 39.116,14.554 40.616,14.554 42.116,14.554 43.616,14.554 45.116,14.554 27.051,14.63 28.551,14.63 30.051,14.63 31.551,14.63 33.051,14.63 51.13,14.656 52.63,14.656 54.13,14.656 55.63,14.656 57.13,14.656 99.72,15.95 101.22,15.95 102.72,15.95 104.22,15.95 21.92,16.586 99.72,17.45 101.22,17.45 102.72,17.45 104.22,17.45 2.046,17.653 3.546,17.653 5.046,17.653 6.546,17.653 8.046,17.653 9.546,17.653 11.046,17.653 21.864,18.086 99.72,18.95 101.22,18.95 102.72,18.95 104.22,18.95 2.1,19.101 3.6,19.101 5.1,19.101 6.6,19.101 8.1,19.101 9.6,19.101 11.1,19.101 21.864,19.586 99.72,20.45 101.22,20.45 102.72,20.45 104.22,20.45 21.864,21.086 99.72,21.95 101.22,21.95 102.72,21.95 104.22,21.95 21.864,22.586 99.72,23.45 101.22,23.45 102.72,23.45 104.22,23.45 21.864,24.086 99.72,24.95 101.22,24.95 102.72,24.95 104.22,24.95 99.72,26.45 101.22,26.45 102.72,26.45 104.22,26.45 99.72,27.95 101.22,27.95 102.72,27.95 104.22,27.95 99.72,29.45 101.22,29.45 102.72,29.45 104.22,29.45 99.72,30.95 101.22,30.95 102.72,30.95 104.22,30.95 99.72,32.45 101.22,32.45 102.72,32.45 104.22,32.45 99.72,33.95 101.22,33.95 102.72,33.95 104.22,33.95 99.72,35.45 101.22,35.45 102.72,35.45 104.22,35.45 99.72,36.95 101.22,36.95 102.72,36.95 104.22,36.95 99.72,38.45 101.22,38.45 102.72,38.45 104.22,38.45 21.789,39.879 99.72,39.95 101.22,39.95 102.72,39.95 104.22,39.95 21.789,41.379 99.72,41.45 101.22,41.45 102.72,41.45 104.22,41.45 21.789,42.879 99.72,42.95 101.22,42.95 102.72,42.95 104.22,42.95 21.789,44.379 99.72,44.45 101.22,44.45 102.72,44.45 104.22,44.45 21.789,45.879 21.789,47.379 21.793,60.511 99.644,61.313 101.144,61.313 102.644,61.313 104.144,61.313 21.793,62.011 99.644,62.813 101.144,62.813 102.644,62.813 104.144,62.813 21.793,63.511 99.644,64.313 101.144,64.313 102.644,64.313 104.144,64.313 21.793,65.011 99.644,65.813 101.144,65.813 102.644,65.813 104.144,65.813 21.793,66.511 99.644,67.313 101.144,67.313 102.644,67.313 104.144,67.313 21.793,67.996 99.644,68.813 101.144,68.813 102.644,68.813 104.144,68.813 99.644,70.313 101.144,70.313 102.644,70.313 104.144,70.313 99.644,71.813 101.144,71.813 102.644,71.813 104.144,71.813 99.644,73.313 101.144,73.313 102.644,73.313 104.144,73.313 99.644,74.813 101.144,74.813 102.644,74.813 104.144,74.813 99.644,76.313 101.144,76.313 102.644,76.313 104.144,76.313 99.644,77.813 101.144,77.813 102.644,77.813 104.144,77.813 99.644,79.313 101.144,79.313 102.644,79.313 104.144,79.313 99.644,80.813 101.144,80.813 102.644,80.813 104.144,80.813 21.692,82.06 99.644,82.313 101.144,82.313 102.644,82.313 104.144,82.313 21.692,83.56 99.644,83.813 101.144,83.813 102.644,83.813 104.144,83.813 21.692,85.06 99.644,85.313 101.144,85.313 102.644,85.313 104.144,85.313 21.692,86.56 99.644,86.813 101.144,86.813 102.644,86.813 104.144,86.813 21.692,88.06 99.644,88.313 101.144,88.313 102.644,88.313 104.144,88.313 21.692,89.56 99.644,89.813 101.144,89.813 102.644,89.813 104.144,89.813 99.644,91.313 101.144,91.313 102.644,91.313 104.144,91.313 58.821,91.362 60.321,91.362 61.821,91.362 63.321,91.362 64.821,91.362 34.792,91.388 36.292,91.388 37.792,91.388 39.292,91.388 40.792,91.388 22.804,91.413 24.304,91.413 25.804,91.413 27.304,91.413 28.804,91.413 46.832,91.693 48.332,91.693 49.832,91.693 51.332,91.693 52.832,91.693 58.821,92.862 60.321,92.862 61.821,92.862 63.321,92.862 64.821,92.862 34.792,92.888 36.292,92.888 37.792,92.888 39.292,92.888 40.792,92.888 22.804,92.913 24.304,92.913 25.804,92.913 27.304,92.913 28.804,92.913 46.832,93.193 48.332,93.193 49.832,93.193 51.332,93.193 52.832,93.193 21,94.7 22.5,94.7 24,94.7 25.5,94.7 27,94.7 28.5,94.7 30,94.7 40,94.7 41.5,94.7 43,94.7 44.5,94.7 46,94.7 47.5,94.7 49,94.7 50.5,94.7 52,94.7 53.5,94.7 55,94.7 56.5,94.7 58,94.7 59.5,94.7 61,94.7 62.5,94.7 64,94.7 65.5,94.7 67,94.7 68.5,94.7 70,94.7 79.8,94.7 81.3,94.7 82.8,94.7 84.3,94.7 85.8,94.7 87.3,94.7 88.8,94.7 21,96.2 22.5,96.2 24,96.2 25.5,96.2 27,96.2 28.5,96.2 30,96.2 40,96.2 41.5,96.2 43,96.2 44.5,96.2 46,96.2 47.5,96.2 49,96.2 50.5,96.2 52,96.2 53.5,96.2 55,96.2 56.5,96.2 58,96.2 59.5,96.2 61,96.2 62.5,96.2 64,96.2 65.5,96.2 67,96.2 68.5,96.2 70,96.2 79.8,96.2 81.3,96.2 82.8,96.2 84.3,96.2 85.8,96.2 87.3,96.2 88.8,96.2 21,97.7 22.5,97.7 24,97.7 25.5,97.7 27,97.7 28.5,97.7 30,97.7 40,97.7 41.5,97.7 43,97.7 44.5,97.7 46,97.7 47.5,97.7 49,97.7 50.5,97.7 52,97.7 53.5,97.7 55,97.7 56.5,97.7 58,97.7 59.5,97.7 61,97.7 62.5,97.7 64,97.7 65.5,97.7 67,97.7 68.5,97.7 70,97.7 79.8,97.7 81.3,97.7 82.8,97.7 84.3,97.7 85.8,97.7 87.3,97.7 88.8,97.7 21,99.2 22.5,99.2 24,99.2 25.5,99.2 27,99.2 28.5,99.2 30,99.2 40,99.2 41.5,99.2 43,99.2 44.5,99.2 46,99.2 47.5,99.2 49,99.2 50.5,99.2 52,99.2 53.5,99.2 55,99.2 56.5,99.2 58,99.2 59.5,99.2 61,99.2 62.5,99.2 64,99.2 65.5,99.2 67,99.2 68.5,99.2 70,99.2 79.8,99.2 81.3,99.2 82.8,99.2 84.3,99.2 85.8,99.2 87.3,99.2 88.8,99.2 39.288,101.218 40.788,101.218 42.288,101.218 43.788,101.218 45.288,101.218 27.223,101.243 28.723,101.243 30.223,101.243 31.723,101.243 33.223,101.243 51.252,101.243 52.752,101.243 54.252,101.243 55.752,101.243 57.252,101.243 63.037,101.294 64.537,101.294 66.037,101.294 67.537,101.294 69.037,101.294 39.288,102.718 40.788,102.718 42.288,102.718 43.788,102.718 45.288,102.718 27.223,102.743 28.723,102.743 30.223,102.743 31.723,102.743 33.223,102.743 51.252,102.743 52.752,102.743 54.252,102.743 55.752,102.743 57.252,102.743 63.037,102.794 64.537,102.794 66.037,102.794 67.537,102.794 97.856,114.503 99.356,114.503 100.856,114.503 102.356,114.503 103.856,114.503 105.356,114.503 106.856,114.503 108.356,114.503 97.91,115.951 99.41,115.951 100.91,115.951 102.41,115.951 103.91,115.951 105.41,115.951 106.91,115.951 108.41,115.951 21.807,128.001 21.807,129.501 21.807,131.001 21.807,132.501 21.807,134.001 21.807,135.501
OUT_U: J1.5 J5.1 R2.1 R3.1 R6.1 R11.1 R14.1 | length 80.7
  Top Layer w0.5: 16.4,116.92 16.4,116.696 17.069,116.027 v1(24.638,116.027)
  Signal Layer 2 w0.5: v1(24.638,116.027) 24.638,116.016 24.206,115.584 24.206,106.045 25.07,105.181 67.64,105.181 70.307,102.514 82.245,102.514 82.8,103.069 v1(82.8,104.6)
  other v1: 84.3,104.6 85.8,104.6 87.3,104.6 88.8,104.6 90.3,104.6 91.8,104.6 93.3,104.6 82.8,106.1 84.3,106.1 85.8,106.1 87.3,106.1 88.8,106.1 90.3,106.1 91.8,106.1 93.3,106.1 82.8,107.6 84.3,107.6 85.8,107.6 87.3,107.6 82.8,109.1 84.3,109.1 85.8,109.1 82.8,110.6 84.3,110.6 85.8,110.6 82.8,112.1 84.3,112.1 85.8,112.1 82.8,113.6 84.3,113.6 85.8,113.6 82.8,115.1 84.3,115.1 85.8,115.1 87.3,115.1 82.8,116.6 84.3,116.6 85.8,116.6 87.3,116.6 88.8,116.6 90.3,116.6 91.8,116.6 93.3,116.6 82.8,118.1 84.3,118.1 85.8,118.1 87.3,118.1 88.8,118.1 90.3,118.1 91.8,118.1 93.3,118.1 82.8,119.6 84.3,119.6 85.8,119.6 87.3,119.6 88.8,119.6 90.3,119.6 91.8,119.6 93.3,119.6 82.8,121.1 84.3,121.1 85.8,121.1 87.3,121.1 88.8,121.1 90.3,121.1 91.8,121.1 93.3,121.1 82.8,122.6 84.3,122.6 85.8,122.6 87.3,122.6 82.8,124.1 84.3,124.1 85.8,124.1 82.8,125.6 84.3,125.6 85.8,125.6 82.8,127.1 84.3,127.1 85.8,127.1 82.8,128.6 84.3,128.6 85.8,128.6 82.8,130.1 84.3,130.1 85.8,130.1 87.3,130.1 82.8,131.6 84.3,131.6 85.8,131.6 87.3,131.6 88.8,131.6 93.3,131.6 82.8,133.1 84.3,133.1 85.8,133.1 87.3,133.1 88.8,133.1 90.3,133.1 91.8,133.1 93.3,133.1
OUT_V: J4.5 J6.1 R25.1 R26.1 R28.1 R33.1 R35.1 | length 85.8
  Top Layer w0.5: 16.482,73.516 v1(18.399,73.516)
  Signal Layer 2 w0.5: v1(18.399,73.516) 23.325,73.516 24.79,74.981 24.79,78.791 24.065,79.516 24.065,88.672 24.358,88.965 30.75,88.965 30.761,88.976 67.31,88.976 69.723,91.389 83.312,91.389 84.2,90.501 v1(84.2,89.2)
  other v1: 82.7,60.7 84.2,60.7 85.7,60.7 87.2,60.7 88.7,60.7 90.2,60.7 91.7,60.7 93.2,60.7 82.7,62.2 84.2,62.2 85.7,62.2 87.2,62.2 88.7,62.2 90.2,62.2 91.7,62.2 93.2,62.2 82.7,63.7 84.2,63.7 85.7,63.7 87.2,63.7 82.7,65.2 84.2,65.2 85.7,65.2 82.7,66.7 84.2,66.7 85.7,66.7 82.7,68.2 84.2,68.2 85.7,68.2 82.7,69.7 84.2,69.7 85.7,69.7 82.7,71.2 84.2,71.2 85.7,71.2 87.2,71.2 82.7,72.7 84.2,72.7 85.7,72.7 87.2,72.7 88.7,72.7 90.2,72.7 91.7,72.7 93.2,72.7 82.7,74.2 84.2,74.2 85.7,74.2 87.2,74.2 88.7,74.2 90.2,74.2 91.7,74.2 93.2,74.2 82.7,75.7 84.2,75.7 85.7,75.7 87.2,75.7 88.7,75.7 90.2,75.7 91.7,75.7 93.2,75.7 82.7,77.2 84.2,77.2 85.7,77.2 87.2,77.2 88.7,77.2 90.2,77.2 91.7,77.2 93.2,77.2 82.7,78.7 84.2,78.7 85.7,78.7 87.2,78.7 82.7,80.2 84.2,80.2 85.7,80.2 82.7,81.7 84.2,81.7 85.7,81.7 82.7,83.2 84.2,83.2 85.7,83.2 82.7,84.7 84.2,84.7 85.7,84.7 82.7,86.2 84.2,86.2 85.7,86.2 87.2,86.2 82.7,87.7 84.2,87.7 85.7,87.7 87.2,87.7 88.7,87.7 93.2,87.7 82.7,89.2 85.7,89.2 87.2,89.2 88.7,89.2 90.2,89.2 91.7,89.2 93.2,89.2
OUT_W: J7.1 J9.5 R46.1 R47.1 R49.1 R54.1 R56.1 | length 80
  Top Layer w0.5: J9.5@16.4,28.46 16.414,28.446 16.414,27.503 17.018,26.899 v1@24.525,26.899
  Signal Layer 2 w0.5: v1@24.531,26.867 24.531,26.831 24.155,26.456 24.155,17.78 24.892,17.043 58.725,17.043 58.75,17.069 67.666,17.069 70.383,14.351 81.458,14.351 82.6,15.493 v1(82.6,16.6)
  other v1: 84.1,16.6 85.6,16.6 87.1,16.6 88.6,16.6 90.1,16.6 91.6,16.6 93.1,16.6 82.6,18.1 84.1,18.1 85.6,18.1 87.1,18.1 88.6,18.1 90.1,18.1 91.6,18.1 93.1,18.1 82.6,19.6 84.1,19.6 85.6,19.6 87.1,19.6 82.6,21.1 84.1,21.1 85.6,21.1 82.6,22.6 84.1,22.6 85.6,22.6 82.6,24.1 84.1,24.1 85.6,24.1 82.6,25.6 84.1,25.6 85.6,25.6 24.562,26.899 82.6,27.1 84.1,27.1 85.6,27.1 87.1,27.1 82.6,28.6 84.1,28.6 85.6,28.6 87.1,28.6 88.6,28.6 90.1,28.6 91.6,28.6 93.1,28.6 82.6,30.1 84.1,30.1 85.6,30.1 87.1,30.1 88.6,30.1 90.1,30.1 91.6,30.1 93.1,30.1 82.6,31.6 84.1,31.6 85.6,31.6 87.1,31.6 88.6,31.6 90.1,31.6 91.6,31.6 93.1,31.6 82.6,33.1 84.1,33.1 85.6,33.1 87.1,33.1 88.6,33.1 90.1,33.1 91.6,33.1 93.1,33.1 82.6,34.6 84.1,34.6 85.6,34.6 87.1,34.6 82.6,36.1 84.1,36.1 85.6,36.1 82.6,37.6 84.1,37.6 85.6,37.6 82.6,39.1 84.1,39.1 85.6,39.1 82.6,40.6 84.1,40.6 85.6,40.6 82.6,42.1 84.1,42.1 85.6,42.1 87.1,42.1 82.6,43.6 84.1,43.6 85.6,43.6 87.1,43.6 88.6,43.6 93.1,43.6 82.6,45.1 84.1,45.1 85.6,45.1 87.1,45.1 88.6,45.1 90.1,45.1 91.6,45.1 93.1,45.1